# Altium PCB PCB_STM32智能饮水机V03_2023-04-25 - 副本.pcbdoc
Units mil, origin at the board's own origin, x right, y up, seen from the top; angles counter-clockwise.
Board outline 5612.95 x 4947.01 mil, 2 copper layers (Top Layer, Bottom Layer); 93 components, 63 nets, 287 pads, 33 vias.
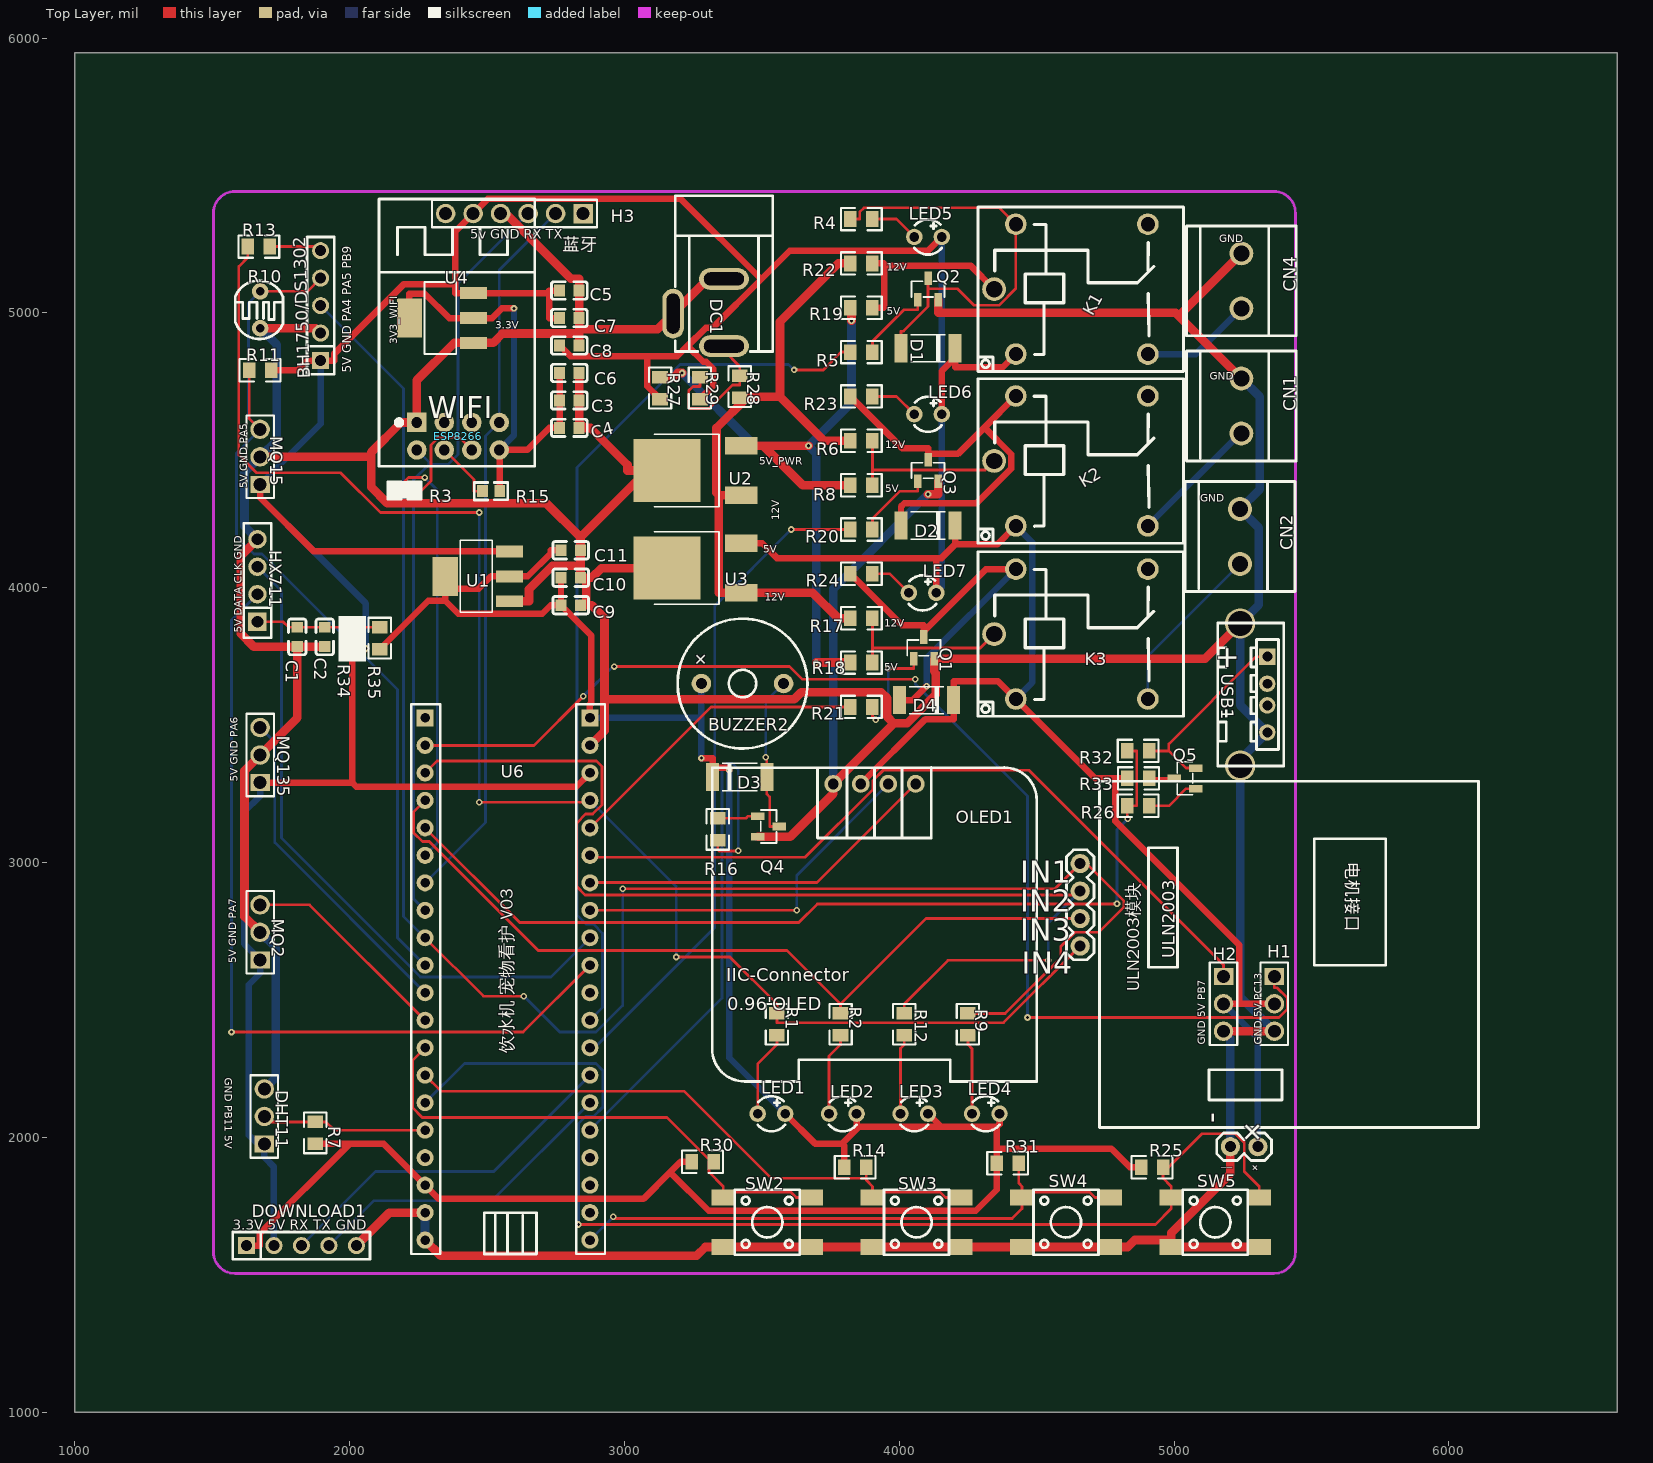
[diagram p0: Top Layer view]
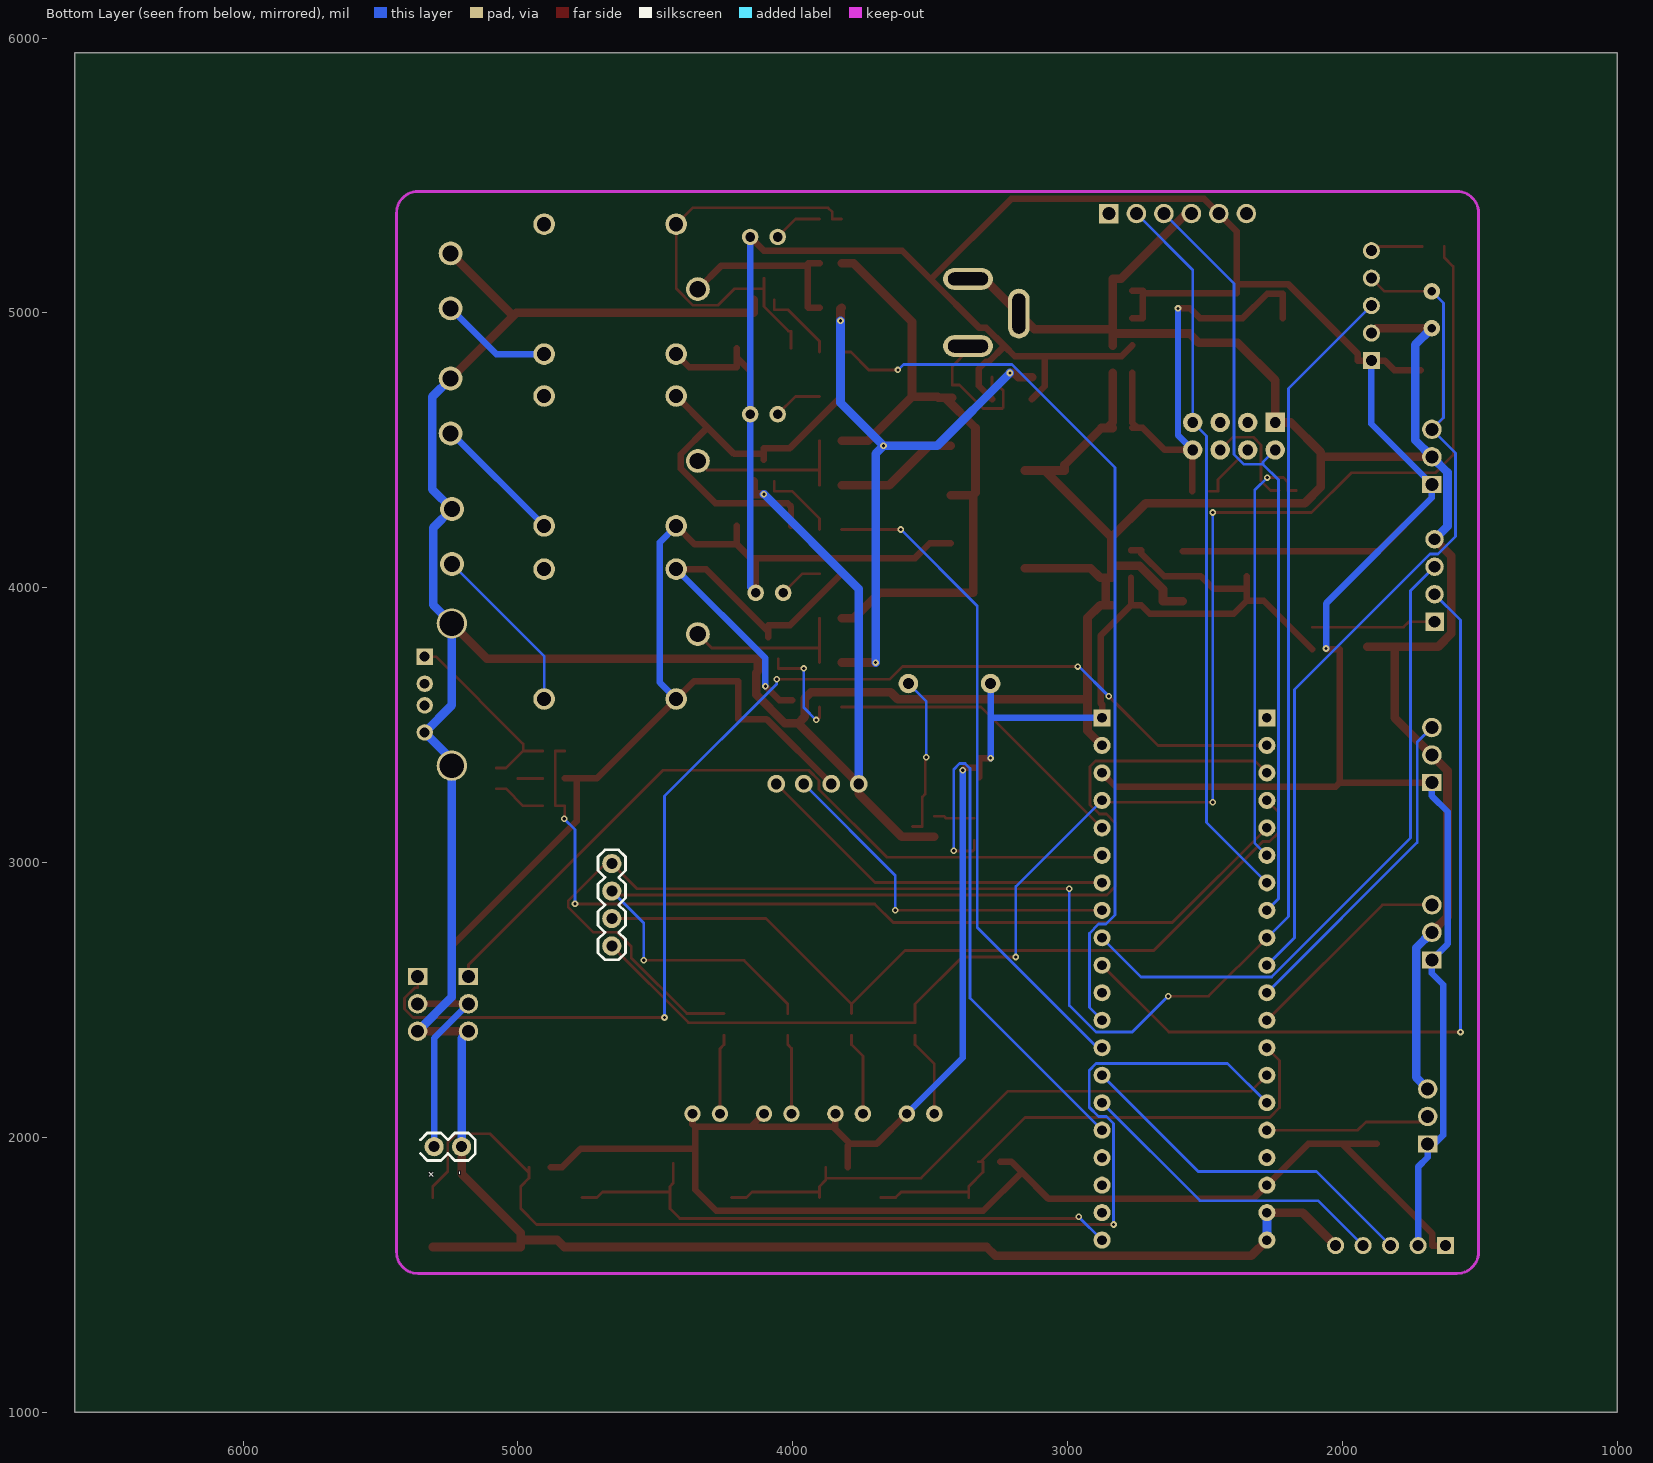
[diagram p1: Bottom Layer view, seen from below]

## Layer stack, top to bottom
Top Layer: signal copper (thickness not stored)
Dielectric: dielectric 12.6, FR-4, Dk 4.8
Bottom Layer: signal copper (thickness not stored)

## Board outline
6612.95,1000 1000,1000 1000,5947.01 6612.95,5947.01

## Components (designator, comment, footprint, x,y, rotation, side; value= is the part's Value field where it differs from the comment)
BH1750/DS1302 "Female header　2.54 1*5Ｐ" HDR-TH_5P-P2.54-V-F 1895,5026.5 r90 top
BUZZER2 "FMQ-BUZZER2" BUZ-TH_BD12.0-P7.60-D0.6-FD 3430,3651.5 r0 top
C1 "0.1UF" C0603 1810,3821.24 r270 top
C2 "0.1UF" C0603 1910,3821.24 r270 top
C3 "0.1UF" C0603 2800,4681.5 r180 top
C4 "0.1UF" C0603 2800,4581.5 r180 top
C5 "0.1UF" C0603 2800,5081.5 r180 top
C6 "0.1UF" C0603 2800,4781.5 r180 top
C7 "0.1UF" C0603 2800,4981.5 r180 top
C8 "0.1UF" C0603 2800,4881.5 r180 top
C9 "0.1UF" C0603 2805,3936.5 r180 top
C10 "0.1UF" C0603 2805,4036.5 r180 top
C11 "0.1UF" C0603 2805,4136.5 r180 top
CN1 "MKDSN1.5/2-5.08" CONN-TH_2P-P5.08_1714984 5245,4661.5 r90 top
CN2 "MKDSN1.5/2-5.08" CONN-TH_2P-P5.08_1714984 5240,4186.5 r90 top
CN4 "MKDSN1.5/2-5.08" CONN-TH_2P-P5.08_1714984 5245,5116.5 r90 top
D1 "1N4734A_C238924" LL-41_L5.0-W2.5-RD 4105,4871.5 r180 top
D2 "1N4734A_C238924" LL-41_L5.0-W2.5-RD 4105,4226.5 r180 top
D3 "1N4734A_C238924" LL-41_L5.0-W2.5-RD 3420,3311.5 r0 top
D4 "1N4734A_C238924" LL-41_L5.0-W2.5-RD 4100,3591.5 r180 top
DC1 "DC-005-25A" DC-IN-TH_DC005 3270,5001.5 r270 top
DHT11 "Header 2.54_1x3" HDR-TH_3P-P2.54-V-M-1 1690,2076.5 r90 top
DOWNLOAD1 "Female header　2.54 1*5Ｐ" HDR-TH_5P-P2.54-V-F 1825,1606.5 r0 top
ESP8266 "ESP-01S_C503582" WIFIM-TH_8P-L24.7-W14.4-P2.54 2395,4551.5 r90 top
H1 "Header 2.54_1x3" HDR-TH_3P-P2.54-V-M-1 5365,2486.5 r270 top
H2 "Header 2.54_1x3" HDR-TH_3P-P2.54-V-M-1 5180,2486.5 r270 top
H3 "蓝牙" HDR-TH_6P-P2.54-V-M-1 2600,5361.5 r180 top
HX711 "HX711" HDR-TH_4P-P2.54-V-F 1665,4026.5 r90 top
K1 "JQC-3FF/05-1ZS(551)" RELAY-TH_HF3FF-XX-1ZXX-XXX 4625,5086.5 r0 top
K2 "JQC-3FF/05-1ZS(551)" RELAY-TH_HF3FF-XX-1ZXX-XXX 4625,4461.5 r0 top
K3 "JQC-3FF/05-1ZS(551)" RELAY-TH_HF3FF-XX-1ZXX-XXX 4625,3831.5 r0 top
LED1 "264-7SURT/S530-A3" LED-TH_BD3.2-P2.54-RD 3535,2086.5 r0 top
LED2 "264-7SURT/S530-A3" LED-TH_BD3.2-P2.54-RD 3794.99,2086.5 r0 top
LED3 "264-7SURT/S530-A3" LED-TH_BD3.2-P2.54-RD 4054.99,2086.5 r0 top
LED4 "264-7SURT/S530-A3" LED-TH_BD3.2-P2.54-RD 4315,2086.5 r0 top
LED5 "264-7SURT/S530-A3" LED-TH_BD3.2-P2.54-RD 4105.01,5276.5 r0 top
LED6 "264-7SURT/S530-A3" LED-TH_BD3.2-P2.54-RD 4105.01,4631.5 r0 top
LED7 "264-7SURT/S530-A3" LED-TH_BD3.2-P2.54-RD 4085,3981.5 r0 top
MQ2 "Header 2.54_1x3" HDR-TH_3P-P2.54-V-M-1 1675,2746.5 r90 top
MQ15 "Header 2.54_1x3" HDR-TH_3P-P2.54-V-M-1 1675,4476.5 r90 top
MQ135 "Header 2.54_1x3" HDR-TH_3P-P2.54-V-M-1 1675,3391.5 r90 top
OLED1 "0.96OLED_4P_MODULE_JX" 0.96OLED_4P 3910,3286.5 r0 top
Q1 "FHT9014Y-ME" SOT-23-3_L2.9-W1.3-P1.90-LS2.4-BR 4090,3781.5 r270 top
Q2 "FHT9014Y-ME" SOT-23-3_L2.9-W1.3-P1.90-LS2.4-BR 4105.01,5086.5 r270 top
Q3 "FHT9014Y-ME" SOT-23-3_L2.9-W1.3-P1.90-LS2.4-BR 4105.01,4426.5 r270 top
Q4 "FHT9014Y-ME" SOT-23-3_L2.9-W1.3-P1.90-LS2.4-BR 3525,3131.5 r180 top
Q5 "FHT9014Y-ME" SOT-23-3_L2.9-W1.3-P1.90-LS2.4-BR 5040,3306.5 r0 top
R1 "1K" 0805 3555,2411.5 r270 top
R2 "1K" 0805 3786.67,2411.5 r270 top
R3 "0R" R0603 2200,4354 r0 top
R4 "1K" 0805 3862.5,5341.5 r0 top
R5 "2k" 0805 3862.5,4857.4 r0 top
R6 "0R" 0805 3862.5,4534.68 r0 top
R7 "10K" 0805 1875,2016.5 r270 top
R8 "0R" 0805 3862.5,4373.31 r0 top
R9 "1K" 0805 4250,2411.5 r270 top
R10 "GL5539" RES-TH_L5.1-W4.3-P3.40-D0.5 1675,5011.5 r0 top
R11 "10K" 0805 1675,4791.5 r0 top
R12 "1K" 0805 4018.33,2411.5 r270 top
R13 "NC/0R" 0805 1670,5241.5 r180 top
R14 "10K" 0805 3840,1891.5 r0 top
R15 "220R" R0603 2515,4351.5 r180 top
R16 "1k" 0805 3340,3121.5 r90 top
R17 "0R" 0805 3862.5,3889.22 r0 top
R18 "0R" 0805 3862.5,3727.86 r0 top
R19 "0R" 0805 3862.5,5018.77 r0 top
R20 "2k" 0805 3862.5,4211.95 r0 top
R21 "2k" 0805 3862.5,3566.5 r0 top
R22 "0R" 0805 3862.5,5180.13 r0 top
R23 "1K" 0805 3862.5,4696.04 r0 top
R24 "1K" 0805 3862.5,4050.58 r0 top
R25 "10K" 0805 4920,1891.5 r0 top
R26 "1k" 0805 4870,3206.5 r0 top
R27 "NC/0R" 0805 3130,4726.5 r270 top
R28 "NC/0R" 0805 3420,4731.5 r270 top
R29 "0R" 0805 3275,4726.5 r270 top
R30 "10K" 0805 3285,1911.5 r0 top
R31 "10K" 0805 4395,1906.5 r0 top
R32 "NC/0R" 0805 4870,3406.5 r0 top
R33 "1k" 0805 4870,3306.5 r180 top
R34 "0R" 0805 2010,3816.5 r270 top
R35 "NC/0R" 0805 2110,3816.5 r270 top
SW2 "K2-1102DP-A4SW-04" SW-SMD_4P-L6.0-W6.0-P4.50-LS10.0-BL-SOKA 3519.96,1691.51 r0 top
SW3 "K2-1102DP-A4SW-04" SW-SMD_4P-L6.0-W6.0-P4.50-LS10.0-BL-SOKA 4063.26,1691.51 r0 top
SW4 "K2-1102DP-A4SW-04" SW-SMD_4P-L6.0-W6.0-P4.50-LS10.0-BL-SOKA 4606.66,1691.51 r0 top
SW5 "K2-1102DP-A4SW-04" SW-SMD_4P-L6.0-W6.0-P4.50-LS10.0-BL-SOKA 5149.96,1691.51 r0 top
U1 "AMS1117-3.3_C2992570" SOT-223-3_L6.4-W3.5-P2.30-LS7.0-BR 2465,4041.5 r0 top
U2 "AS7805ADTR-E1" TO-252-2_L6.6-W6.1-P4.57-LS9.9-BR-CW 3290,4426.5 r0 top
U3 "AS7805ADTR-E1" TO-252-2_L6.6-W6.1-P4.57-LS9.9-BR-CW 3290,4071.5 r0 top
U4 "AMS1117-3.3_C2992570" SOT-223-3_L6.4-W3.5-P2.30-LS7.0-BR 2335,4981.5 r0 top
U6 "STM32最小系统" STM32最小系统板C8T6 2575,2546.5 r0 top
ULN2003 "ULN2003模块 COPY" ULN2003-SOKA 5395,2611.5 r0 top
USB1 "USB-A-F-180-H20.5" USB-A-TH_C168710 5290,3611.5 r270 top

## Footprints (in the part's own frame and the unit in brackets; to place one, negate y for a bottom-side part, rotate by r counter-clockwise, add the part's x,y. Pads: shape width x height; smd on the part's side, far side on the other; paste and mask are expansions set on the pad)
0.96OLED_4P [mm]
  round 1.65 hole 1 paste+0 mask+0.051: 1(-3.81,-0.001) 2(-1.27,0.002) 3(1.27,0.002) 4(3.81,0.002)
  silkscreen extent -15,-27.5 15,1.5
0805 [mm]
  rect 1.16x1.45 smd paste+0 mask+0.102: 1(-1.016,0) 2(1.016,0)
  silkscreen extent -1.9,-1.03 1.87,1.04
BUZ-TH_BD12.0-P7.60-D0.6-FD [mm]
  round 1.8 hole 1 paste+0 mask+0.051: 1(-3.8,0) 2(3.8,0)
  silkscreen extent -6,-6 6,6
C0603 [mm]
  rect 1x1.1 smd paste+0 mask+0.102: 1(-0.9,0) 2(0.9,0)
  silkscreen extent -1.65,-0.8 1.65,0.8
CONN-TH_2P-P5.08_1714984 [mm]
  round 2.2 hole 1.5 paste+0 mask+0.051: 1(-2.54,0) 2(2.54,0)
  silkscreen extent -5.08,-5.08 5.08,5.08
DC-IN-TH_DC005 [mm]
  oval 2x4.6 hole 1.2 slot 3.7 at 90 deg paste+0 mask+0.051: 1(3.1,2.35) 2(-3.1,2.35)
  oval 4.6x2 hole 1.2 slot 3.7 at 0 deg paste+0 mask+0.051: 3(0.1,-2.35)
  silkscreen extent -10.8,-2.15 3.6,6.85
HDR-TH_3P-P2.54-V-M-1 [mm]
  rect 1.575x1.8 hole 1.2 paste+0 mask+0.051: 1(-2.54,0)
  round 1.8 hole 1.2 paste+0 mask+0.051: 2(0,0) 3(2.54,0)
  silkscreen extent -3.81,-1.27 3.81,1.27
HDR-TH_4P-P2.54-V-F [mm]
  rect 1.7x1.7 hole 1.1 paste+0 mask+0.051: 1(-3.81,0)
  round 1.7 hole 1.1 paste+0 mask+0.051: 2(-1.27,0) 3(1.27,0) 4(3.81,0)
  silkscreen extent -5.29,-1.27 5.29,1.27
HDR-TH_5P-P2.54-V-F [mil]
  rect 62x62 hole 40.16 paste+0 mask+2: 1(-200,0)
  round 62 hole 40.16 paste+0 mask+2: 2(-100,0) 3(0,0) 4(100,0) 5(200,0)
  silkscreen extent -250,-50 250,50
HDR-TH_6P-P2.54-V-M-1 [mm]
  rect 1.8x1.8 hole 1.2 paste+0 mask+0.051: 1(-6.35,0)
  round 1.8 hole 1.2 paste+0 mask+0.051: 2(-3.81,0) 3(-1.27,0) 4(1.27,0) 5(3.81,0) 6(6.35,0)
  silkscreen extent -7.62,-1.27 7.62,1.27
LED-TH_BD3.2-P2.54-RD [mil]
  round 60 hole 35.43 paste+0 mask+2: 1(-50,0) 2(50,0)
  silkscreen extent -50,-64 50,64
LL-41_L5.0-W2.5-RD [mm]
  rect 1.2x2.6 smd paste+0 mask+0.051: 1(-2.5,0) 2(2.5,0)
  silkscreen extent -1.6,-1.25 1.6,1.25
R0603 [mm]
  rect 1x1.1 smd paste+0 mask+0.102: 1(-0.8,0) 2(0.8,0)
  silkscreen extent -1.55,-0.8 1.55,0.81
RELAY-TH_HF3FF-XX-1ZXX-XXX [mm]
  round 2 hole 1.3 paste+0 mask+0.051: 1(-5.1,-6) 2(-5.1,6) 3(7.1,6) 5(7.1,-6)
  round 2.2 hole 1.5 paste+0 mask+0.051: 4(-7.1,0)
  silkscreen extent -8.6,-7.6 10.4,7.6
RES-TH_L5.1-W4.3-P3.40-D0.5 [mil]
  round 60 hole 30 paste+0 mask+2: 1(0,66.93) 2(0,-66.93)
  silkscreen extent -91,-106 83,106
SOT-23-3_L2.9-W1.3-P1.90-LS2.4-BR [mm]
  rect 1.25x0.7 smd paste+0 mask+0.051: 1(1,-0.95) 2(1,0.95) 3(-1,0)
  silkscreen extent -0.73,-1.53 0.73,1.53
SOT-223-3_L6.4-W3.5-P2.30-LS7.0-BR [mm]
  rect 2.5x1.1 smd paste+0 mask+0.051: 1(2.97,-2.3) 2(2.97,0) 3(2.97,2.3)
  rect 2.34x3.6 smd paste+0 mask+0.051: 4(-2.97,0)
  silkscreen extent -1.57,-3.33 1.37,3.33
STM32最小系统板C8T6 [mil]
  rect 62x62 hole 35 paste+0 mask+4: 1(-300,980) 40(300,980)
  round 62 hole 35 paste+0 mask+4: 2(-300,880) 3(-300,780) 4(-300,680) 5(-300,580) 6(-300,480) 7(-300,380) 8(-300,280) 9(-300,180) 10(-300,80) 11(-300,-20) 12(-300,-120) 13(-300,-220) 14(-300,-320) 15(-300,-420) 16(-300,-520) 17(-300,-620) 18(-300,-720) 19(-300,-820) 20(-300,-920) 21(300,-920) 22(300,-820) 23(300,-720) 24(300,-620) 25(300,-520) 26(300,-420) 27(300,-320) 28(300,-220) 29(300,-120) 30(300,-20) 31(300,80) 32(300,180) 33(300,280) 34(300,380) 35(300,480) 36(300,580) 37(300,680) 38(300,780) 39(300,880)
  silkscreen extent -350,-970 355,1030
SW-SMD_4P-L6.0-W6.0-P4.50-LS10.0-BL-SOKA [mm]
  rect 2.2x1.5 smd paste+0 mask+0.051: 1(-4.064,-2.286) 2(4.064,-2.286) 3(-4.064,2.286) 4(4.064,2.286)
  silkscreen extent -3,-3 3,3
TO-252-2_L6.6-W6.1-P4.57-LS9.9-BR-CW [mm]
  rect 3x1.6 smd paste+0 mask+0.051: 1(3.424,-2.29) 3(3.424,2.29)
  rect 6.2x5.8 smd paste+0 mask+0.051: 2(-3.424,0)
  silkscreen extent -4.58,-3.35 1.38,3.35
ULN2003-SOKA [mil]
  round 70 hole 40 paste+0 mask+4: 1(-736.4,385) 2(-736.4,285) 3(-736.4,185) 4(-736.4,85) 5(-190,-645) 6(-90,-645)
  silkscreen extent -786,-695 713,685
USB-A-TH_C168710 [mm]
  rect 1.524x1.524 hole 0.92 paste+0 mask+0.051: 1(-3.5,1.25)
  round 1.524 hole 0.92 paste+0 mask+0.051: 2(-1,1.25) 3(1,1.25) 4(3.5,1.25)
  round 2.8 hole 2.3 paste+0 mask+0.051: 5(6.575,-1.25) 6(-6.575,-1.25)
  silkscreen extent -6.6,-3.32 6.6,2.77
WIFIM-TH_8P-L24.7-W14.4-P2.54 [mm]
  rect 1.8x1.8 hole 1 paste+0 mask+0.051: 1(1.27,3.81)
  round 1.8 hole 1 paste+0 mask+0.051: 2(1.27,1.27) 3(1.27,-1.27) 4(1.27,-3.81) 5(-1.27,3.81) 6(-1.27,1.27) 7(-1.27,-1.27) 8(-1.27,-3.81)
  silkscreen extent -2.77,-7.11 21.93,7.31

## Via types
v1: diameter 24.02, hole 12.01, Top Layer to Bottom Layer, tented both sides, 33 vias

## Nets (pads, with @x,y where several pads share a name; then routed paths per layer and width w, separated by ;. In a path a pad name is that pad's centre, name@x,y a point inside that pad or via, vN(x,y) a via of type N, cw(c..) or ccw(c..) an arc to the next point about the centre after c; other vN are vias at no path point)
3V3: BUZZER2.1 C9.2 C10.2 C11.2 D3.1 DOWNLOAD1.1 LED1.2 LED2.2 LED3.2 LED4.2 R7.2 R14.1 R25.1 R30.1 R31.1 R35.2 U1.2 U1.4 U6.18 U6.40 | length 9307.8
  Top Layer w23.62: DOWNLOAD1.1 1673.8,1606.5 1673.8,1650.3 2000,1976.5 ; R7.2 2000,1976.5 ; R35.2 2286.33,3952.83 2348.07,3952.83 ; U1.4 U1.4@2348.07,3997.17 ; C10.2 2769.56,3997.05 C9.2 ; C11.2 2732.08,4136.5 2732.08,4124.64 2648.94,4041.5 U1.2 2514.92,4041.5 2470.59,3997.17 U1.4@2348.07,3997.17 ; U6.40 2875,3575.3 2880.44,3580.74 2880.44,3825.62 C9.2 ; R30.1 3204.37,1911.5 3166.4,1873.53 ; v1(3280.4,3380.48) 3321.57,3380.48 D3.1@3321.57,3345.99 ; D3.1 D3.1@3321.57,3345.99 ; v1(3381.52,3336.46) 3371.99,3345.99 D3.1@3321.57,3345.99 ; LED1.2 3693.71,1977.79 3792.87,1977.79 ; R14.1 3800,1970.66 3792.87,1977.79 ; LED2.2 3845,2038.63 ; LED3.2 4152.87,2038.63 ; LED4.2 4365,2048.63 4355,2038.63 ; R25.1 4839.37,1891.5 4772.07,1958.8 4355,1958.8 ; 2000,1976.5 2125,1976.5 U6.18 2325,1776.5 3069.37,1776.5 3166.4,1873.53 ; 2348.07,3952.83 2395.36,3905.54 2701.12,3905.54 2732.08,3936.5 C9.2 ; 2348.07,3952.83 2348.07,3975 U1.4@2348.07,3997.17 ; 3166.4,1873.53 3306.86,1733.07 4278.2,1733.07 4355,1809.87 R31.1 4355,1952.84 4355,1958.8 ; 3792.87,1977.79 3845,2029.92 3845,2038.63 ; 3845,2038.63 4152.87,2038.63 ; 4152.87,2038.63 4355,2038.63 ; 4355,1958.8 4355,2038.63
  Bottom Layer w23.62: U6.40 3280.4,3526.5 ; v1(3280.4,3380.48) 3280.4,3526.5 ; BUZZER2.1 3280.4,3526.5 ; v1(3381.52,3336.46) 3381.52,2289.98 LED1.2
3V3_WIFI: C3.2 C4.2 C6.2 ESP8266.8 R15.1 U4.2 U4.4 | length 1668.4
  Top Layer w23.62: U4.4 2218.07,5070.17 2273.95,5070.17 2362.62,4981.5 U4.2 2518.94,4981.5 2553.76,5016.32 v1(2598.55,5016.32) ; R15.1 2546.49,4500.01 ESP8266.8 2647.08,4501.5 2727.08,4581.5 C4.2@2745.82,4581.5 ; C4.2 C4.2@2745.82,4581.5 ; C6.2 C3.2 2764.56,4600.24 C4.2@2745.82,4581.5
  Bottom Layer w23.62: ESP8266.8 2598.55,4555.05 v1(2598.55,5016.32)
5V: BH1750/DS1302.1 C5.2 C7.2 C8.2 D1.1 D2.1 D4.1 DHT11.1 DOWNLOAD1.2 H1.2 H2.2 H3.5 K1.1 K2.1 K3.1 LED5.2 LED6.2 LED7.2 MQ2.1 MQ15.1 MQ135.1 OLED1.2 R11.2 R27.2 R29.2 R33.2 R34.2 U1.3 U3.3 U4.3 U6.38 ULN2003.6 | length 17667
  Top Layer w23.62: MQ135.1 1728.23,3291.5 2010,3291.5 ; MQ15.1 1675,4327.7 1870.65,4132.05 2548.43,4132.05 U1.3 ; R11.2 1811.2,4791.5 1846.2,4826.5 1870.6,4826.5 BH1750/DS1302.1 1943.8,4826.5 1943.8,4850.91 2198.04,5105.15 2384.92,5105.15 ; v1(2060,3779) 2057.5,3776.5 2056.34,3776.5 R34.2 2010,3291.5 ; C8.2 2804.08,4841.98 3082.94,4841.98 ; C7.2 2727.08,4981.5 2727.08,5062.6 2717.63,5072.05 ; C5.2 2727.08,5081.5 2717.63,5072.05 ; U6.38 2825,3276.5 2025,3276.5 2010,3291.5 ; R27.2 3082.94,4733.56 3082.94,4841.98 ; R29.2 3323.33,4734.83 3323.33,4796.47 3297.58,4822.22 3286.93,4822.22 3229.89,4879.27 ; U3.3 3501.66,4161.66 3555.24,4108.08 4135,4108.08 ; OLED1.2@3860,3286.55 4095.97,3522.52 4198.43,3522.52 D4.1 4198.43,3660.48 4359.01,3660.48 K3.1 4712.99,3306.5 4786.12,3306.5 ; LED7.2 4135,4108.08 ; LED6.2 4155.01,4788.59 D1.1@4203.43,4837.01 ; LED5.2 4105.08,5226.57 3602.09,5226.57 3497.66,5122.14 ; D2.1 4203.43,4157.52 ; D1.1 D1.1@4203.43,4837.01 ; K2.1 4356.45,4157.52 4203.43,4157.52 ; K1.1 4376.45,4802.52 4203.43,4802.52 D1.1@4203.43,4837.01 ; R33.2 4786.12,3306.5 ; H2.2 5237.81,2486.5 ; H1.2 5237.81,2486.5 ; 2384.92,5105.15 2384.92,5296.42 H3.5 2503.3,5414.8 3204.99,5414.8 3497.66,5122.14 ; 2384.92,5105.15 2384.92,5072.05 2420.21,5072.05 U4.3 2717.63,5072.05 ; 3082.94,4841.98 3192.6,4841.98 3229.89,4879.27 ; 3229.89,4879.27 3296.01,4945.39 3320.91,4945.39 3497.66,5122.14 ; 4135,4108.08 4153.99,4108.08 4203.43,4157.52 ; 4786.12,3306.5 4786.12,3151.05 5237.81,2699.36 5237.81,2486.5
  Bottom Layer w23.62: MQ135.1 1675,3242.7 1617.23,3184.93 1617.23,2704.27 MQ2.1 1675,2597.7 1633.28,2555.98 1633.28,2008.82 DHT11.1@1690,1952.1 ; DHT11.1 DHT11.1@1690,1952.1 ; DOWNLOAD1.2 1725,1892.7 1690,1927.7 DHT11.1@1690,1952.1 ; BH1750/DS1302.1 1895,4596.5 MQ15.1 1675,4327.7 2060,3942.7 v1(2060,3779) ; LED7.2 4155.01,4001.51 LED6.2 LED5.2 ; K3.1 4484.38,3655.45 4484.38,4165.11 K2.1 ; H2.2 5305,2361.5 ULN2003.6
5V_PWR: R8.1 R18.1 R19.1 R27.1 U2.3 | length 2770.2
  Top Layer w31.5: R27.1 3180.28,4766.5 3195.15,4781.37 v1(3210.1,4781.37) ; U2.3 3505.6,4516.66 ; v1(3669.94,4516.66) 3505.6,4516.66 ; v1(3698.82,3727.86) R18.1 ; R8.1 3648.95,4373.31 3505.6,4516.66 ; R19.1 3826.48,5014.79 v1(3826.48,4971.98)
  Bottom Layer w31.5: v1(3210.1,4781.37) 3474.81,4516.66 v1(3669.94,4516.66) ; v1(3698.82,3727.86) 3698.82,4487.78 v1(3669.94,4516.66) ; v1(3826.48,4971.98) 3826.48,4673.2 v1(3669.94,4516.66)
+12V: R6.1 R17.1 R22.1 R28.2 U2.1 U3.1 | length 2444.8
  Top Layer w31.5: R28.2 R28.2@3445.14,4691.5 ; U2.1 3344.01,4336.34 ; R17.1 3777.93,3889.22 3685.81,3981.34 U3.1 3344.01,3981.34 3343.94,3981.41 3343.94,4336.27 3344.01,4336.34 ; R6.1 3726.34,4534.68 3566.13,4694.89 ; R22.1 3777.93,5180.14 3566.13,4968.34 3566.13,4694.89 ; 3344.01,4336.34 3335.07,4345.28 3335.07,4581.43 R28.2@3445.14,4691.5 ; R28.2@3445.14,4691.5 3470.28,4691.5 3473.67,4694.89 3566.13,4694.89
BUZZER2_2: BUZZER2.2 D3.2 Q4.3 | length 588.8
  Top Layer w10: v1(3514.14,3383.84) 3518.42,3379.56 D3.2 3518.42,3249.33 3528.77,3238.98 3528.77,3131.5 Q4.3
  Bottom Layer w10: v1(3514.14,3383.84) 3514.14,3586.03 BUZZER2.2
CN2_1: CN2.1 K3.5 | length 630.2
  Bottom Layer w10: K3.5 4904.53,3751.03 CN2.1
DC1_1: DC1.1 R28.1 R29.1 | length 529.7
  Top Layer w10: R29.1 3275,4732.68 3249.63,4732.68 3234.35,4717.4 3234.35,4656.57 3238.31,4652.61 3308.11,4652.61 3393.18,4737.68 3420,4737.68 R28.1 3420,4788.42 3420,4805.33 3362.52,4862.81 DC1.1
GND: BH1750/DS1302.2 C1.2 C2.2 C3.1 C4.1 C5.1 C6.1 C7.1 C8.1 C9.1 C10.1 C11.1 CN1.2 CN2.2 CN4.2 DC1.2 DC1.3 DHT11.3 DOWNLOAD1.5 ESP8266.1 H1.3 H2.3 H3.4 HX711.4 MQ2.2 MQ15.2 MQ135.2 OLED1.1 Q1.2 Q2.2 Q3.2 Q4.2 R10.2 SW2.1 SW2.2 SW3.1 SW3.2 SW4.1 SW4.2 SW5.1 SW5.2 U1.1 U2.2 U3.2 U4.1 U6.19 U6.20 U6.39 ULN2003.5 USB1.4 USB1.5 USB1.6 | length 22969.2
  Top Layer w31.5: HX711.4 1604.07,4115.57 1604.07,3833.45 1651.72,3785.8 C1.2 ; MQ2.2 1617.76,2803.74 1617.76,3334.26 MQ135.2 1810,3526.5 C1.2 ; MQ15.2 2079.39,4476.5 ; R10.2 1876.93,4944.57 BH1750/DS1302.2 ; C2.2 C1.2 ; DOWNLOAD1.5 2145,1726.5 U6.19 ; U6.20 2332,1569.5 3262.9,1569.5 3294.91,1601.51 3327.44,1601.51 SW2.1 SW2.2 SW3.1 4223.26,1601.51 SW4.1 4766.66,1601.51 4799.18,1601.51 4831.7,1601.51 4857.34,1627.15 SW5.1@4989.96,1627.15 ; H3.4 2568.38,5361.5 2804.99,5124.89 2835.43,5124.89 C5.1 C7.1 2835.43,4959.81 2835.43,4940.64 ; U1.1 2652.88,3950.95 2652.88,3994.34 2738.5,4079.96 2840.36,4079.96 ; C4.1 2856.15,4581.5 ; C6.1 C3.1 2835.43,4602.22 2856.15,4581.5 ; C8.1 2835.43,4923.39 2835.43,4924.96 ; C9.1 2861.15,3936.5 ; U6.39 2927.81,3479.31 2927.81,3594.27 ; U3.2 2916.86,4071.5 2881.86,4036.5 2861.15,4036.5 ; U2.2 U2.2@3083.31,4426.5 ; DC1.2 3303.46,5123.54 DC1.3 3120.56,4940.64 2835.43,4940.64 ; Q4.2 3603.39,3094.1 3760,3250.71 3760,3286.45 3980.1,3506.55 ; v1(4105.01,4340.78) 4142.4,4340.78 Q3.2 ; Q2.2 4142.4,5000.78 5005.72,5000.78 5017.5,4989 ; H2.3 H1.3 ; ULN2003.5 5205,1867.82 4989.96,1652.78 SW5.1@4989.96,1627.15 ; USB1.6@5240.79,3870.35 5112.57,3742.13 Q1.2 4127.4,3695.78 4133.44,3689.74 4133.44,3611.74 4028.25,3506.55 3980.1,3506.55 ; CN1.2 5017.5,4989 ; CN4.2 5017.5,4989 ; SW5.2 SW5.1 SW5.1@4989.96,1627.15 ; 2079.39,4476.5 2079.39,4366.26 2137.83,4307.82 2716.23,4307.82 2840.43,4183.62 ; 2079.39,4476.5 2079.39,4493.06 2187.83,4601.5 ESP8266.1 2245,4754.97 2380.98,4890.95 2416.46,4890.95 U4.1 2522.88,4890.95 2556.89,4924.96 2835.43,4924.96 ; 2835.43,4924.96 2835.43,4940.64 ; 2840.36,4079.96 2840.36,4093.04 2840.43,4093.11 C11.1 2840.43,4183.62 ; 2840.36,4079.96 2840.43,4079.89 C10.1 2861.15,4036.5 ; 2840.43,4183.62 U2.2@3083.31,4426.5 ; 2856.15,4581.5 2876.86,4581.5 3011.41,4446.95 3011.41,4426.5 U2.2@3083.31,4426.5 ; 2861.15,3936.5 2881.86,3936.5 2927.81,3890.55 2927.81,3594.27 ; 2861.15,3936.5 2861.15,4036.5 ; 2927.81,3594.27 3618.1,3594.27 3644.02,3620.19 3933.79,3620.19 3956.15,3597.83 3956.15,3530.5 3980.1,3506.55
  Bottom Layer w31.5: HX711.4 1617.76,4223.74 1617.76,4419.26 MQ15.2 1735.84,4537.34 1735.84,4883.73 R10.2 ; MQ2.2 1732.24,2689.26 1732.24,2218.74 DHT11.3 ; U6.20 U6.19 ; OLED1.1@3760,3286.45 3760,3995.77 v1(4105.01,4340.78) ; H2.3 5205,2361.5 ULN2003.5 ; CN1.2 5311.46,4695.04 5311.46,4357.96 CN2.2 5308.1,4218.4 5308.1,3937.66 5240.79,3870.35 5240.79,3572.12 USB1.4 5240.79,3375.28 USB1.5 5240.79,2510.71 H1.3
HX711_1: C1.1 C2.1 HX711.1 R34.1 R35.1 | length 453.3
  Top Layer w10: HX711.1 1757.53,3876.5 1777.36,3856.67 C1.1 C2.1 1942.64,3856.67 1942.81,3856.5 R34.1 R35.1
K1_4: K1.4 R19.2 R22.2 | length 680.1
  Top Layer w23.62: R19.2 3943.14,5018.77 3945.79,5021.42 3945.79,5172.43 ; R22.2 3943.14,5180.14 3943.14,5175.08 3945.79,5172.43 ; K1.4 4259.54,5172.43 3945.79,5172.43
K1_5: CN4.1 K1.5 | length 409.3
  Bottom Layer w23.62: K1.5 5078.78,4850.28 CN4.1
K2_2: D2.2 K2.2 Q3.3 R23.1 | length 1527.4
  Top Layer w23.62: R23.1 4010.26,4508.28 4105,4508.28 Q3.3@4105,4487.08 ; D2.2 4006.58,4295.48 4018.26,4307.16 4281.64,4307.16 4408.13,4433.65 4408.13,4485.36 4309.99,4583.5 ; Q3.3 Q3.3@4105,4487.08 ; K2.2 4309.99,4583.5 ; Q3.3@4105,4487.08 4213.57,4487.08 4309.99,4583.5
K2_5: CN1.1 K2.5 | length 479.7
  Bottom Layer w23.62: K2.5 5240.75,4561.5 CN1.1
K3_2: D4.2 K3.2 Q1.3 R24.1 | length 1494.6
  Top Layer w23.62: R24.1 4009.81,3863.28 4090,3863.28 Q1.3@4090,3842.08 ; D4.2 4049.72,3591.5 v1(4099.63,3641.41) ; Q1.3 Q1.3@4090,3842.08 ; K3.2 4315.64,4067.72 Q1.3@4090,3842.08
  Bottom Layer w23.62: v1(4099.63,3641.41) 4099.63,3743.14 K3.2
LED1_1: LED1.1 R1.2 | length 314
  Top Layer w10: LED1.1 3485,2267.68 3555,2337.68 R1.2
LED2_1: LED2.1 R2.2 | length 302.3
  Top Layer w10: LED2.1 3745,2296.01 3786.67,2337.68 R2.2
LED6_1: LED6.1 R23.2 | length 179.2
  Top Layer w10: R23.2 3990.47,4696.04 LED6.1
LED7_1: LED7.1 R24.2 | length 161.1
  Top Layer w10: R24.2 3965.91,4050.59 LED7.1
LED_VCC: Q5.2 R32.2 USB1.1 | length 710.4
  Top Layer w10: R32.2 4981.17,3406.5 ; Q5.2 5043.77,3343.9 4981.17,3406.5 ; USB1.1 5298.22,3749.29 4981.17,3432.24 4981.17,3406.5
PA0: R26.1 R32.1 U6.5 | length 3329.7
  Top Layer w10: U6.5 2619.31,2782.19 3634.41,2782.19 3702.06,2849.84 v1(4792.53,2849.84) ; R32.1 4863.83,3406.5 4863.9,3406.43 4863.9,3206.57 4863.83,3206.5 4846.92,3206.5 R26.1 4830,3161.52 v1(4832.02,3159.5)
  Bottom Layer w10: v1(4792.53,2849.84) 4792.53,3120.01 v1(4832.02,3159.5)
PA1: R3.1 U6.6 | length 1554.3
  Top Layer w10: R3.1 2199.18,4354 2199.18,4384.67 2215.44,4400.93 v1(2273.44,4400.93)
  Bottom Layer w10: v1(2273.44,4400.93) 2319.52,4354.85 2319.52,3071.02 U6.6
PA2/TX: ESP8266.4 H3.2 U6.7 | length 2631.8
  Bottom Layer w10: U6.7 2495.2,3146.7 2495.2,4551.7 ESP8266.4 2545,5156.5 H3.2
PA3/RX: ESP8266.5 H3.3 U6.8 | length 2836.6
  Bottom Layer w10: ESP8266.5 2289.04,4457.46 2289.04,4449.14 ; U6.8 2232.92,2868.58 2232.92,4393.02 2289.04,4449.14 ; H3.3 2394.99,5106.49 2394.99,4485.46 2358.67,4449.14 2289.04,4449.14
PA4/SCL: BH1750/DS1302.3 R9.1 U6.9 ULN2003.1 | length 6474.3
  Top Layer w10: U6.9 2487.26,2514.24 v1(2634.15,2514.24) ; v1(2993.88,2904.86) 4566.96,2904.86 ULN2003.1 4681.16,2996.5 4817.21,2860.45 4817.21,2838.16 4725.55,2746.5 4639.97,2746.5 4587.66,2694.19 4587.66,2653.6 4385.56,2451.5 R9.1
  Bottom Layer w10: BH1750/DS1302.3 2196.78,4724.72 2196.78,2804.72 U6.9 ; v1(2634.15,2514.24) 2764.95,2383.44 2897.31,2383.44 2993.88,2480.01 v1(2993.88,2904.86)
PA5/SDA: BH1750/DS1302.4 MQ15.3 R10.1 R11.1 U6.10 | length 3294.9
  Top Layer w10: R11.1 1635,4616.5 MQ15.3 ; R10.1 1846.93,5078.43 BH1750/DS1302.4
  Bottom Layer w10: R10.1 1632.55,5035.98 1632.55,4618.95 MQ15.3 1589.14,4490.64 1589.14,4186.99 1653.09,4123.04 1681.48,4123.04 2174.84,3629.68 2174.84,2726.66 U6.10
PA6: MQ135.3 U6.11 | length 1213.5
  Bottom Layer w10: MQ135.3 1728.43,3438.07 1728.43,3073.07 U6.11
PA7: MQ2.3 U6.12 | length 774
  Top Layer w10: MQ2.3 1855,2846.5 U6.12
PA8: R16.1 U6.25 | length 1997.5
  Top Layer w10: R16.1 3340,3047.68 3345.01,3042.67 v1(3414.42,3042.67)
  Bottom Layer w10: U6.25 3355.48,2506.98 3355.48,3343.04 3372.79,3360.35 3393.61,3360.35 3414.42,3339.54 v1(3414.42,3042.67)
PA9/TX: DOWNLOAD1.4 U6.26 | length 1165.4
  Bottom Layer w10: DOWNLOAD1.4 2088.57,1770.07 2518.57,1770.07 U6.26
PA10/RX: DOWNLOAD1.3 U6.27 | length 1306.8
  Bottom Layer w10: DOWNLOAD1.3 2095,1876.5 2525,1876.5 U6.27
PA11: R20.1 U6.28 | length 2413.5
  Top Layer w10: v1(3606.76,4211.95) R20.1
  Bottom Layer w10: U6.28 2890.76,2326.5 3328.95,2764.69 3328.95,3934.14 v1(3606.76,4211.95)
PA12: R5.1 U6.29 | length 3270.5
  Top Layer w10: v1(3617.63,4792.53) 3723.8,4792.53 3788.68,4857.41 R5.1
  Bottom Layer w10: U6.29 2920.96,2472.46 2920.96,2742.87 2887.33,2776.5 2860.13,2776.5 2827.51,2809.12 2827.51,4437.87 3202.32,4812.68 3597.48,4812.68 v1(3617.63,4792.53)
PB0: R30.2 SW2.3 SW2.4 U6.13 | length 1903.1
  Top Layer w10: U6.13 2228.98,2280.48 2228.98,2108.32 2264.74,2072.56 3155.49,2072.56 R30.2@3316.55,1911.5 ; R30.2 R30.2@3316.55,1911.5 ; SW2.3 SW2.3@3359.96,1801.77 ; SW2.4 3625.66,1781.51 3605.4,1801.77 SW2.3@3359.96,1801.77 ; R30.2@3316.55,1911.5 3308.09,1911.5 3308.09,1873.9 3359.96,1822.03 SW2.3@3359.96,1801.77
PB1: R14.2 SW3.3 SW3.4 U6.14 | length 2208.2
  Top Layer w10: U6.14 2332.94,2168.56 3216.64,2168.56 3533.3,1851.9 3880,1851.9 ; R14.2 3880,1851.9 ; SW3.3 SW3.3@3903.26,1801.77 ; SW3.4@4223.26,1781.51 4168.96,1781.51 4148.7,1801.77 SW3.3@3903.26,1801.77 ; 3880,1851.9 3880,1845.29 3903.26,1822.03 SW3.3@3903.26,1801.77
PB3/DATA: HX711.2 U6.31 | length 3036.8
  Top Layer w10: v1(1570.83,2383.52) 2632.02,2383.52 U6.31
  Bottom Layer w10: v1(1570.83,2383.52) 1570.83,3882.33 HX711.2
PB4/CLK: HX711.3 U6.32 | length 2414.4
  Bottom Layer w10: HX711.3 1752.42,3989.08 1752.42,3089.23 2257.69,2583.96 2732.46,2583.96 U6.32
PB5/SCL: OLED1.3 U6.33 | length 1350.2
  Top Layer w10: U6.33 v1(3627.31,2826.5)
  Bottom Layer w10: v1(3627.31,2826.5) 3627.31,2953.86 OLED1.3@3960,3286.55
PB6/SDA: OLED1.4 U6.34 | length 1334.1
  Top Layer w10: U6.34 2876.42,2927.92 3701.37,2927.92 OLED1.4@4060,3286.55
PB7: H2.1 U6.35 | length 2792.8
  Top Layer w10: U6.35 2881.89,3019.61 3657.44,3019.61 3904.34,3266.51 3904.34,3298.54 3941.91,3336.11 4472.38,3336.11 5180,2628.49 H2.1
PB8: R21.1 U6.36 | length 1129.8
  Top Layer w10: U6.36 3315,3566.5 R21.1
PB9/ADDR: R1.1 R13.2 U6.37 ULN2003.4 | length 5617.9
  Top Layer w10: R13.2 1630,5201.97 1597.36,5169.33 1597.36,4482.88 1661.61,4418.63 1967.87,4418.63 2112.71,4273.79 v1(2472.14,4273.79) ; v1(2472.14,3219.22) 2867.72,3219.22 U6.37 ; v1(3188.44,2656.8) 3383.53,2656.8 3555,2485.33 R1.1 3555,2417.68 3555.06,2417.62 4379.72,2417.62 ULN2003.4
  Bottom Layer w10: v1(2472.14,3219.22) v1(2472.14,4273.79) ; U6.37 3188.44,2913.06 v1(3188.44,2656.8)
PB10: R25.2 SW5.3 SW5.4 U6.15 | length 4265.6
  Top Layer w10: v1(2832.94,1683.31) 4932.28,1683.31 4989.96,1740.99 SW5.3 4989.96,1822.03 4960,1851.97 R25.2@4960,1871.74 ; R25.2 R25.2@4960,1871.74 ; SW5.4 5309.96,1822.03 5255,1876.99 5255,1982.74 5224.27,2013.47 5101.73,2013.47 R25.2@4960,1871.74
  Bottom Layer w10: U6.15 2418.05,2269.55 2896.2,2269.55 2921.59,2244.16 2921.59,2109.91 2888.18,2076.5 2858.49,2076.5 2832.94,2050.95 v1(2832.94,1683.31)
PB11: DHT11.2 R7.1 U6.16 | length 605.7
  Top Layer w10: DHT11.2 1710,2056.5 R7.1 1894.77,2056.5 1914.53,2056.5 1944.53,2026.5 U6.16
PB12: R31.2 SW4.3 SW4.4 U6.21 | length 2122.9
  Top Layer w10: v1(2960.07,1711.57) 2966.17,1705.47 4411.14,1705.47 4446.66,1740.99 SW4.3 SW4.3@4446.66,1801.77 ; R31.2 4435,1833.69 4446.66,1822.03 SW4.3@4446.66,1801.77 ; SW4.4@4766.66,1781.51 4712.36,1781.51 4692.1,1801.77 SW4.3@4446.66,1801.77
  Bottom Layer w10: U6.21 v1(2960.07,1711.57)
PC13: H1.1 U6.2 | length 4425.2
  Top Layer w10: U6.2 2671.63,3426.5 v1(2850.57,3605.44) ; v1(2963.5,3713.34) 3601.02,3713.34 3647.01,3667.35 v1(4058.58,3667.35) ; v1(4466.76,2436.51) 5381.91,2436.51 5412.75,2467.35 5412.75,2507.26 5375.5,2544.51 5365,2544.51 H1.1
  Bottom Layer w10: v1(2850.57,3605.44) 2958.47,3713.34 v1(2963.5,3713.34) ; v1(4058.58,3667.35) 4058.58,3649.86 4466.76,3241.68 v1(4466.76,2436.51)
PC14: R12.1 U6.3 ULN2003.2 | length 3934
  Top Layer w10: U6.3 2317.99,3369.49 2898.83,3369.49 2918.35,3349.97 2918.35,3210.08 2884.81,3176.54 2859.02,3176.54 2827.06,3144.58 2827.06,2912.14 2857.4,2881.8 4643.9,2881.8 ULN2003.2 ; R12.1 4018.33,2485.33 4177.58,2644.58 v1(4542.28,2644.58)
  Bottom Layer w10: v1(4542.28,2644.58) 4542.28,2780.18 ULN2003.2
PC15: R2.1 U6.4 ULN2003.3 | length 2981.8
  Top Layer w10: U6.4 2232.94,3184.44 2232.94,3108.8 2265.24,3076.5 2290.26,3076.5 2686.89,2679.87 3592.13,2679.87 3786.67,2485.33 ; R2.1 3786.67,2485.33 ; ULN2003.3 4097.84,2796.5 3786.67,2485.33
Q1_1: Q1.1 R21.2 | length 389.4
  Top Layer w10: R21.2 3902.5,3526.97 3907.56,3526.97 v1(3915.26,3519.27) ; v1(3960.15,3706.53) 4052.6,3706.53 Q1.1
  Bottom Layer w10: v1(3915.26,3519.27) 3960.15,3564.16 v1(3960.15,3706.53)
Q3_1: Q3.1 R20.2 | length 281.7
  Top Layer w10: R20.2 3902.5,4251.48 4002.55,4351.53 4067.61,4351.53 Q3.1
Q4_1: Q4.1 R16.2 | length 148.7
  Top Layer w10: R16.2 3442.63,3161.5 3450.03,3168.9 Q4.1
Q5_3: Q5.3 R33.1 | length 90.6
  Top Layer w10: R33.1 Q5.3
R3_2: ESP8266.7 R3.2 | length 390.1
  Top Layer w10: R3.2 2262.17,4354 2296.5,4388.33 2296.5,4519.73 2324.76,4547.99 2398.51,4547.99 ESP8266.7
R4_1: D1.2 K1.2 Q2.3 R4.1 | length 1562.2
  Top Layer w10: R4.1 3856.33,5341.5 3856.33,5366.87 3871.94,5382.48 4364.45,5382.48 K1.2 4424.21,5088.24 4363.56,5027.59 4273.12,5027.59 4213.15,5087.56 4105,5087.56 ; D1.2 4006.58,4933.67 4015.23,4933.67 4105,5023.44 4105,5087.56 ; Q2.3 4105,5090.27 4105,5087.56
R4_2: LED5.1 R4.2 | length 179.4
  Top Layer w10: R4.2 3990.01,5341.5 LED5.1
R5_2: Q2.1 R5.2 | length 287.7
  Top Layer w10: R5.2 3902.5,4896.94 4017.09,5011.53 4067.61,5011.53 Q2.1
R6_2: K2.4 R6.2 R8.2 | length 617.8
  Top Layer w10: R8.2 3902.5,4428.95 ; R6.2 3902.5,4428.95 ; K2.4 4312.92,4428.95 3902.5,4428.95
R9_2: LED4.1 R9.2 | length 291.2
  Top Layer w10: R9.2 4250,2337.68 4265,2322.68 LED4.1
R12_2: LED3.1 R12.2 | length 290.5
  Top Layer w10: LED3.1 4005,2324.35 4018.33,2337.68 R12.2
R13_1: BH1750/DS1302.5 R13.1 | length 191.2
  Top Layer w10: R13.1 1880,5241.5 BH1750/DS1302.5
R15_2: ESP8266.6 R15.2 | length 225.3
  Top Layer w10: ESP8266.6 2452.83,4393.67 2452.83,4351.5 R15.2
R17_2: K3.4 R17.2 R18.2 | length 625.2
  Top Layer w10: R18.2 3902.5,3781.04 ; R17.2 3902.5,3781.04 ; K3.4 4295.01,3781.04 3902.5,3781.04
R26_2: Q5.1 R26.2 | length 195.3
  Top Layer w10: R26.2 4981.17,3206.5 5043.77,3269.1 Q5.1
pads on no net: ESP8266.2 ESP8266.3 H3.1 H3.6 K1.3 K2.3 K3.3 U6.1 U6.17 U6.22 U6.23 U6.24 U6.30 USB1.2 USB1.3

## Keep-outs
Keep-Out Layer:
  lines w10: 1505,1583.74 ccw(c1583.74,1583.74) 1583.74,1505 ; 1505,5363.27 cw(c1583.74,5363.27) 1583.74,5442.01 ; 5363.27,1505 ccw(c5363.27,1583.74) 5442.01,1583.74 ; 5363.27,5442.01 cw(c5363.27,5363.27) 5442.01,5363.27

## Silkscreen, mask and mechanical layers (free items; w line width, h text height)
Top Overlay:
  rectangle: 2140,4324 2260,4389
  rectangle: 1960,3731.5 2060,3896.5
  text "GND" at 5165,5257.72 h27.56
  text "5v GND RX TX" at 2440,5256.5 h59.05
  text "蓝牙" at 2775,5211.5 h80 r359
  text "12V" at 3955,5152.72 h27.56
  text "5V" at 3955,4992.72 h27.56
  text "3.3V" at 2530,4942.72 h27.56
  text "3V3_WIFI" at 2173.78,4886.5 h27.56 r90
  text "5V GND PA4 PA5 PB9" at 2005.75,4781.5 h31.5 r90
  text "GND" at 5130,4757.72 h27.56
  text "12V" at 3950,4507.72 h27.56
  text "5V_PWR" at 3490,4447.72 h27.56
  text "5V GND PA5" at 1628.78,4361.5 h27.56 r90
  text "5V" at 3950,4347.72 h27.56
  text "GND" at 5095,4312.72 h27.56
  text "12V" at 3563.78,4246.5 h27.56 r90
  text "5V" at 3505,4127.72 h27.56
  text "12V" at 3510,3952.72 h27.56
  text "12V" at 3945,3857.72 h27.56
  text "5V DATA CLK GND" at 1608.78,3836.5 h27.56 r90
  text "+    -" at 5160,3791.5 h80 r270
  text "5V" at 3945,3697.72 h27.56
  text "5V GND PA6" at 1593.78,3294.83 h27.56 r90
  text "5V GND PA7" at 1588.78,2633.17 h27.56 r90
  text "GND 5V PB7" at 5113.78,2336.5 h27.56 r90
  text "GND 5V PC13" at 5318.78,2336.5 h27.56 r90
  text "饮水机 宠物看护 V03" at 2610,2306.5 h80 r90
  text "GND PB11 5V" at 1546.22,2216.5 h27.56 r270
  text "3.3V 5V RX TX GND" at 1575,1663.78 h35.43

## Text inside footprints (layer, text, board x,y; h text height)
BUZZER2: Top Overlay "+" at 3272.69,3703.32 h50 r45
ESP8266: Top Overlay "WIFI" at 2285,4616.5 h80
OLED1: Top Overlay "IIC-Connector" at 3370,2567.88 h47.24; Top Overlay "0.96'OLED" at 3375,2462.88 h47.24
ULN2003: Bottom Overlay "-" at 5223.11,1876.5 h26.22 r90; Bottom Overlay "+" at 5334.27,1867.23 h26.22 r45; Top Overlay "-" at 5172.5,2051.5 h80 r90; Top Overlay "+" at 5294.22,2074.78 h80 r225; Top Overlay "ULN2003模块" at 4890,2531.5 h80 r90; Top Overlay "电机接口" at 5610,3001.5 h80 r270; Top Overlay "+" at 5314.27,1885.77 h26.22 r135; Top Overlay "——" at 5170,1876.5 h26.22; Top Overlay "IN4" at 4446.02,2596.5 h80; Top Overlay "IN3" at 4441.02,2716.5 h80; Top Overlay "IN2" at 4441.02,2821.5 h80; Top Overlay "IN1" at 4441.02,2926.5 h80